# EAGLE board gyro-board (EAGLE 6.6.0)
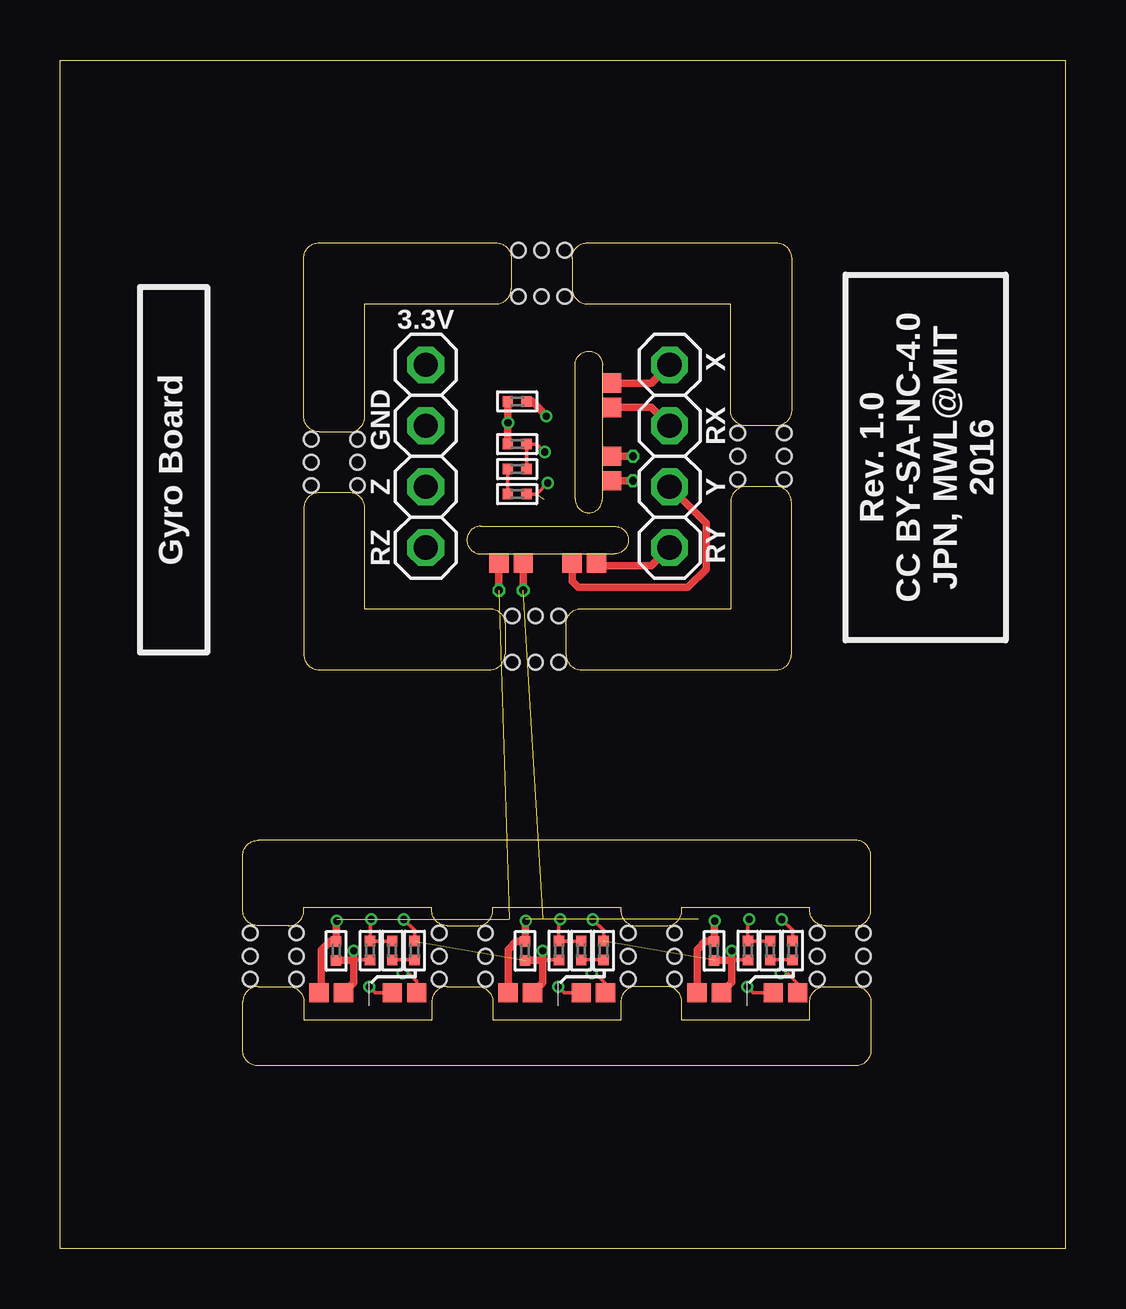
[diagram p0: board, top side]
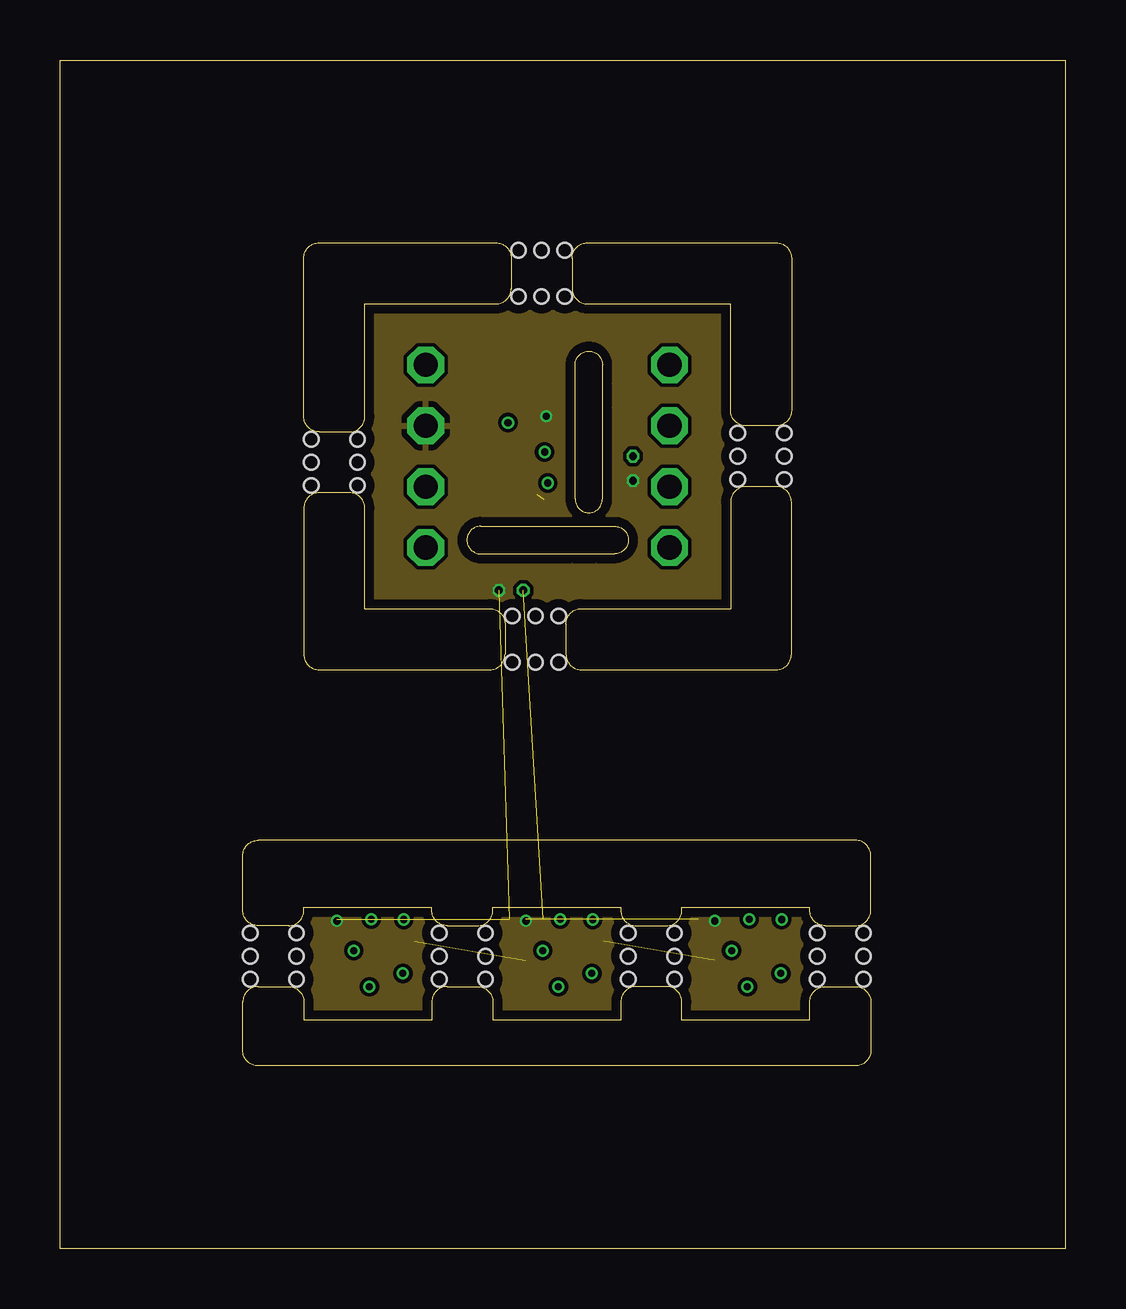
[diagram p1: board, inner layer Route2]
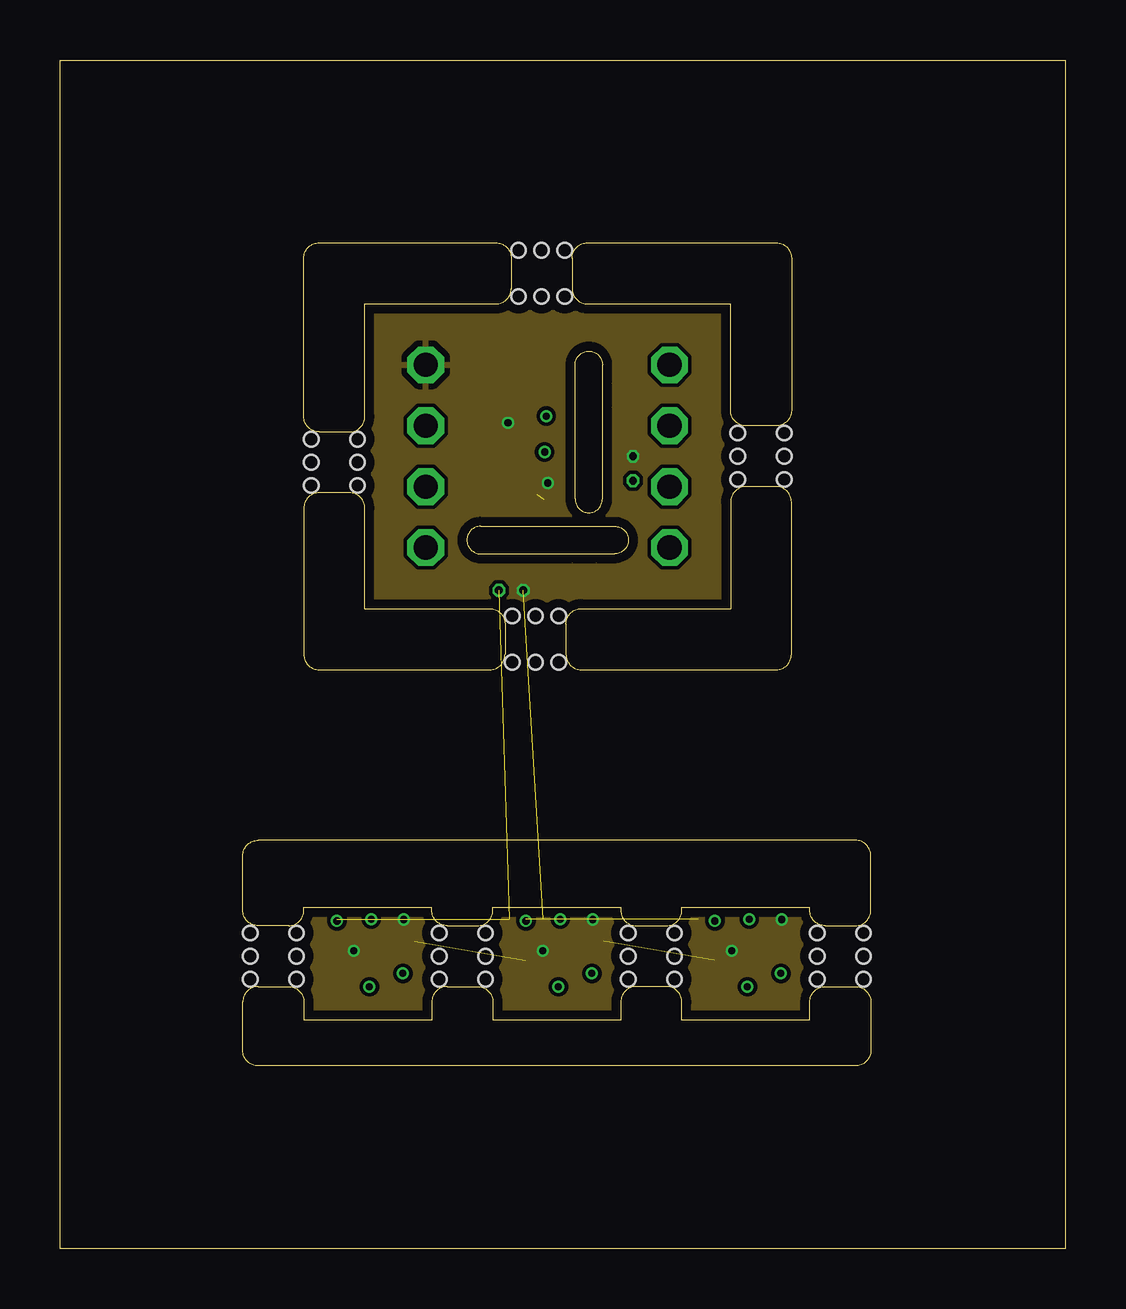
[diagram p2: board, inner layer Route15]
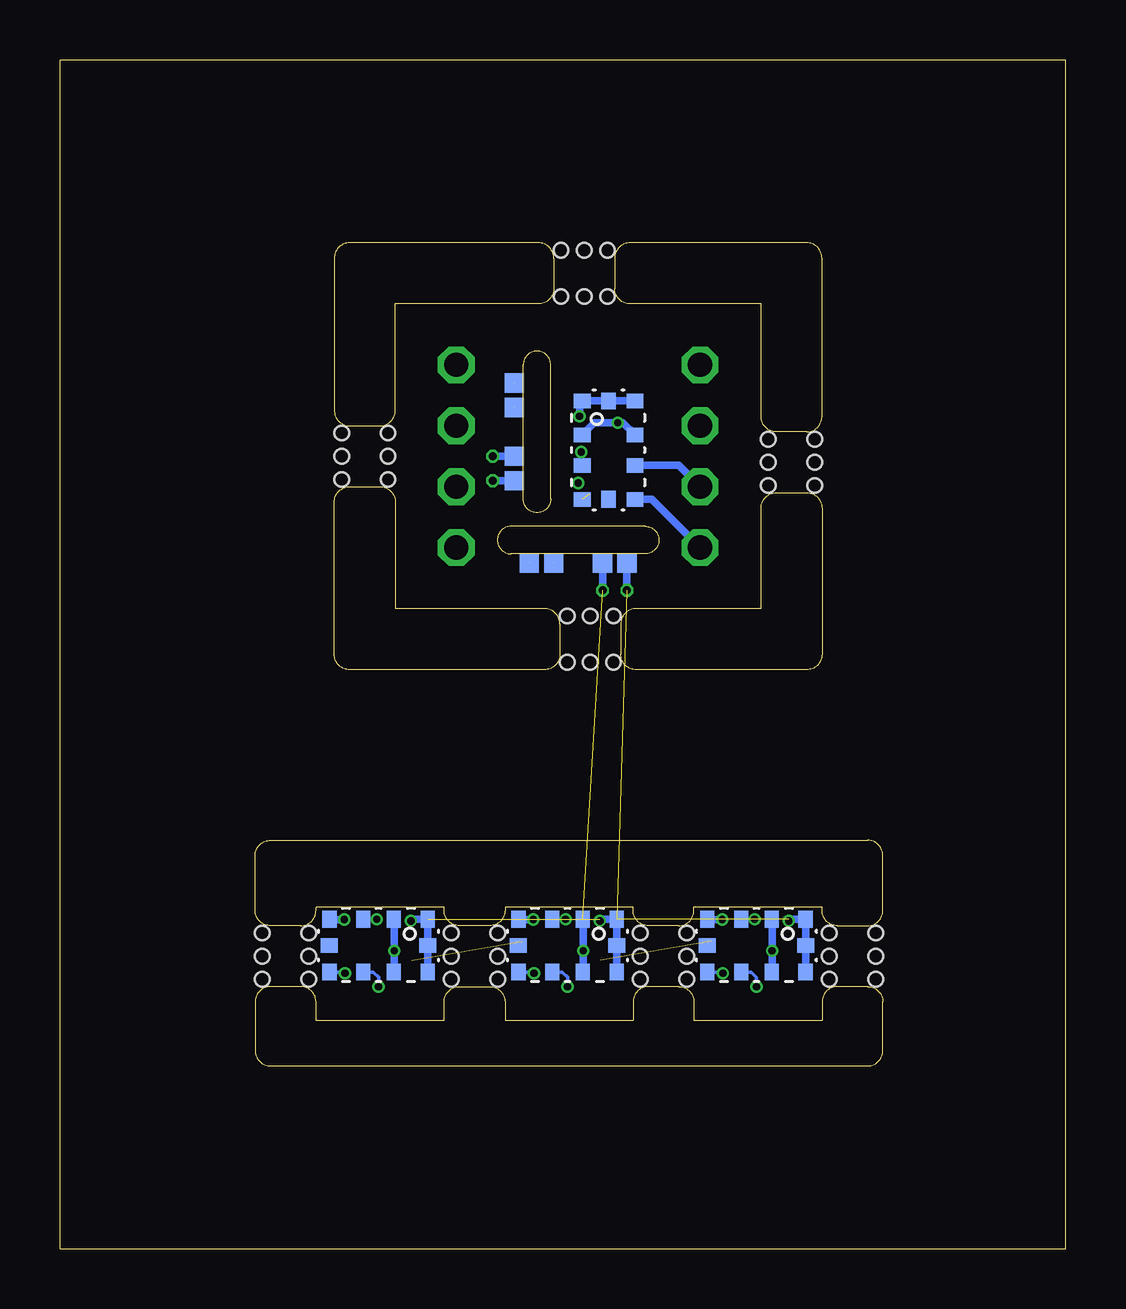
[diagram p3: board, bottom side, seen from below]

Size 41.91 x 49.53 mm. Coordinates in mm from the lower left corner, seen from the top.
Outline: 0,0 0,49.53 41.91,49.53 41.91,0 0,0
Outline: 8.26,10.92 9.53,10.92 arc-90 10.16,10.29 10.16,9.53 15.49,9.53 15.49,10.29 arc-90 16.13,10.92 17.4,10.92 arc-90 18.03,10.29 18.03,9.53 23.37,9.53 23.37,10.29 arc-90 24,10.92 25.27,10.92 arc-90 25.91,10.29 25.91,9.53 31.24,9.53 31.24,10.29 arc-90 31.88,10.92 33.15,10.92 arc-90 33.78,10.29 33.78,8.26 arc-90 33.15,7.62 8.26,7.62 arc-90 7.62,8.26 7.62,10.29 arc-90 8.26,10.92
Outline: 9.53,13.46 8.26,13.46 arc-90 7.62,14.1 7.62,16.38 arc-90 8.26,17.02 33.15,17.02 arc-90 33.78,16.38 33.78,14.1 arc-90 33.15,13.46 31.88,13.46 arc-90 31.24,14.1 31.24,14.22 25.91,14.22 25.91,14.1 arc-90 25.27,13.46 24,13.46 arc-90 23.37,14.1 23.37,14.22 18.03,14.22 18.03,14.1 arc-90 17.4,13.46 16.13,13.46 arc-90 15.49,14.1 15.49,14.22 10.16,14.22 10.16,14.1 arc-90 9.53,13.46
Outline: 12.7,26.67 12.7,30.86 arc90 12.06,31.5 10.79,31.5 arc90 10.16,30.86 10.16,24.77 arc90 10.79,24.13 17.91,24.13 arc90 18.54,24.77 18.54,26.04 arc90 17.91,26.67 12.7,26.67
Outline: 10.79,34.04 12.06,34.04 arc90 12.7,34.67 12.7,39.37 18.16,39.37 arc90 18.8,40.01 18.8,41.27 arc90 18.16,41.91 10.79,41.91 arc90 10.16,41.27 10.16,34.67 arc90 10.79,34.04
Outline: 30.48,24.77 30.48,31.11 arc90 29.84,31.75 28.57,31.75 arc90 27.94,31.11 27.94,26.67 21.72,26.67 arc90 21.08,26.04 21.08,24.77 arc90 21.72,24.13 29.84,24.13 arc90 30.48,24.77
Outline: 30.48,41.27 30.48,34.92 arc-90 29.84,34.29 28.57,34.29 arc-90 27.94,34.92 27.94,39.37 21.97,39.37 arc-90 21.34,40.01 21.34,41.27 arc-90 21.97,41.91 29.84,41.91 arc-90 30.48,41.27
Outline: 17.53,30.1 23.11,30.1 arc-180 23.11,28.96 17.53,28.96 arc-180 17.53,30.1
Outline: 21.46,31.24 21.46,36.83 arc-180 22.61,36.83 22.61,31.24 arc-180 21.46,31.24
Copper layers (1*2*15*16): Top 0.035mm / dielectric 0.2mm / Route2 0.0175mm / dielectric 0.3mm / Route15 0.0175mm / dielectric 0.2mm / Bottom 0.035mm
Design rules "seeed-studio-4-layer": minimum track width 6mil, minimum drill 0.3mm, track to track 6mil, track to pad 6mil, pad to pad 6mil, via to via 6mil, smd to smd 0mil, copper to edge 0.4mm, drill to drill 10mil, minimum pad ring 6mil, minimum via ring 4mil, stop-mask expansion 4mil, vias tented up to drill 100mil, thermal gap 10mil
Holes 0.6 mm at 9.86,13.16 9.86,12.19 9.86,11.23 7.92,13.16 7.92,12.19 7.92,11.23 33.48,13.16 33.48,12.19 33.48,11.23 31.55,13.16 31.55,12.19 31.55,11.23 17.73,13.16 17.73,12.19 17.73,11.23 15.8,13.16 15.8,12.19 15.8,11.23 25.6,13.16 25.6,12.19 25.6,11.23 23.67,13.16 23.67,12.19 23.67,11.23 12.4,33.73 12.4,32.77 12.4,31.8 10.46,33.73 10.46,32.77 10.46,31.8 30.18,33.99 30.18,33.02 30.18,32.05 28.24,33.99 28.24,33.02 28.24,32.05 18.85,26.37 19.81,26.37 20.78,26.37 18.85,24.43 19.81,24.43 20.78,24.43 19.1,41.61 20.07,41.61 21.03,41.61 19.1,39.67 20.07,39.67 21.03,39.67

## Footprints (pad centres in the part's own frame; a part is rotated, then mirrored left to right if it is on the bottom)
0201 = smd 0.432 x 0.432: 1 -0.394,0; 2 0.394,0
TP08SQ = smd 0.8 x 0.8: TP 0,0
LGA-10-COMPACT = smd 0.6 x 0.7: 1 2.05,1.1; 2 0.635,1.1; 3 -0.635,1.1; 4 -2.05,1.1; 6 -2.05,-1.1; 7 -0.635,-1.1; 8 0.635,-1.1; 9 2.05,-1.1 | smd 0.7 x 0.6: 5 -2.05,0; 10 2.05,0
1X04 = drill 1.016 octagon: 1 -3.81,0; 2 -1.27,0; 3 1.27,0; 4 3.81,0

## Placement (x,y rotation side)
C1  470nF  [0201]  11.51,12.41 270 top
C2  470nF  [0201]  13.85,12.43 270 top
C3  10nF  [0201]  12.92,12.43 270 top
C4  10nF  [0201]  20.79,12.43 270 top
C5  470nF  [0201]  21.72,12.43 270 top
C6  470nF  [0201]  19.38,12.41 270 top
C7  10nF  [0201]  28.66,12.43 270 top
C8  470nF  [0201]  29.59,12.43 270 top
C9  470nF  [0201]  27.25,12.41 270 top
C10  10nF  [0201]  19.05,33.53 180 top
C11  470nF  [0201]  19.05,32.49 180 top
C12  470nF  [0201]  19.05,35.31 180 top
R1  10k  [0201]  14.77,12.43 90 top
R2  10k  [0201]  22.65,12.43 90 top
R3  10k  [0201]  30.52,12.43 90 top
R4  10k  [0201]  19.05,31.45 0 top
TP1  [TP08SQ]  10.79,10.67 0 top
TP2  [TP08SQ]  14.86,10.67 0 top
TP3  [TP08SQ]  11.81,10.67 0 top
TP4  [TP08SQ]  18.67,10.67 0 top
TP5  [TP08SQ]  13.84,10.67 0 top
TP6  [TP08SQ]  22.73,10.67 0 top
TP7  [TP08SQ]  19.68,10.67 0 top
TP8  [TP08SQ]  21.72,10.67 0 top
TP9  [TP08SQ]  26.54,10.67 0 top
TP10  [TP08SQ]  30.73,10.67 0 top
TP11  [TP08SQ]  27.56,10.67 0 top
TP12  [TP08SQ]  29.72,10.67 0 top
TP13  [TP08SQ]  19.3,28.57 0 bottom
TP14  [TP08SQ]  22.35,28.57 90 top
TP15  [TP08SQ]  22.35,28.57 270 bottom
TP16  [TP08SQ]  21.34,28.57 270 bottom
TP17  [TP08SQ]  21.34,28.57 90 top
TP18  [TP08SQ]  22.99,35.05 0 top
TP19  [TP08SQ]  22.99,35.05 0 bottom
TP20  [TP08SQ]  22.99,36.07 0 top
TP21  [TP08SQ]  22.99,36.07 0 bottom
TP22  [TP08SQ]  19.3,28.57 0 top
TP23  [TP08SQ]  22.99,33.02 0 top
TP24  [TP08SQ]  22.99,33.02 0 bottom
TP25  [TP08SQ]  18.29,28.57 0 top
TP26  [TP08SQ]  18.29,28.57 0 bottom
TP27  [TP08SQ]  22.99,32 0 top
TP28  [TP08SQ]  22.99,32 0 bottom
U1  LY3200  [LGA-10-COMPACT]  12.89,12.63 0 bottom
U2  LY3200  [LGA-10-COMPACT]  20.76,12.63 0 bottom
U3  LY3200  [LGA-10-COMPACT]  28.64,12.63 0 bottom
U4  LY3200  [LGA-10-COMPACT]  19.05,33.27 90 bottom
U$2  PINHD-1X4  [1X04]  15.24,33.02 90 top
U$3  PINHD-1X4  [1X04]  25.4,33.02 270 top

## Library data of the parts
C1-C12 R1-R4 TP1-TP28 U1-U4 U$2 U$3 = jonnew

## Nets
+3.3V: C1.1 C6.1 C9.1 C12.1 TP1.TP TP4.TP TP9.TP TP25.TP TP26.TP TP27.TP TP28.TP U1.1 U1.9 U1.10 U2.1 U2.9 U2.10 U3.1 U3.9 U3.10 U4.1 U4.9 U4.10 U$2.3
GND: C1.2 C3.2 C4.2 C6.2 C7.2 C9.2 C10.2 C12.2 R1.2 R2.2 R3.2 R4.2 TP3.TP TP7.TP TP11.TP TP13.TP TP22.TP TP23.TP TP24.TP U1.2 U1.4 U1.8 U2.2 U2.4 U2.8 U3.2 U3.4 U3.8 U4.2 U4.4 U4.8 U$2.4
N$1: C4.1 C5.1 U2.3
N$2: C5.2 R2.1
N$3: C2.1 C3.1 U1.3
N$4: C2.2 R1.1
N$5: C7.1 C8.1 U3.3
N$6: C8.2 R3.1
N$7: C10.1 C11.1 U4.3
N$8: C11.2 R4.1
OUT: TP2.TP U1.6
OUT1: TP6.TP U2.6
OUT1_: TP20.TP TP21.TP U$3.1
OUT2: TP10.TP U3.6
OUT2_: TP16.TP TP17.TP U$3.3
OUT3: U4.6 U$2.1
REF1_: TP18.TP TP19.TP U$3.2
REF2_: TP14.TP TP15.TP U$3.4
REF3: U4.7 U$2.2
VREF: TP5.TP U1.7
VREF1: TP8.TP U2.7
VREF2: TP12.TP U3.7

## Tracks (layer width: path | path; a pad name or v marks a point on that pad's centre or on a via)
+3.3V  (via drill 0.3, 0.33)  (3 unrouted)
  Top 0.305: v11.54,13.66 11.51,13.66 C1.1 11.26,12.8 10.89,12.44 10.89,10.76 TP1.TP | C6.1 19.38,13.66 v19.41,13.66 | C6.1 19.13,12.8 | C9.1 27.25,13.66 v27.29,13.66 | C9.1 27,12.8 | TP9.TP 26.54,12.46 26.89,12.8 C9.1 | TP4.TP 18.67,12.46 19.01,12.8 C6.1 | v18.29,27.43 TP25.TP | v23.88,32 TP27.TP | C12.1 19.67,35.31 20.26,34.71 v20.26,34.69
  Bottom 0.305: v11.54,13.66 11.54,13.73 U1.1 U1.10 U1.9 | v19.41,13.66 19.41,13.73 U2.1 U2.10 U2.9 | v27.29,13.66 27.29,13.73 U3.1 U3.10 U3.9 | v18.29,27.43 TP25.TP | v23.88,32 TP27.TP | U4.9 18.72,35.32 arc45 18.94,35.42 U4.10 U4.1 20.26,35.21 v20.26,34.69
  pour Route2: -1,50.21 42.59,50.21 42.59,-2.54 -1,-2.54
GND  (via drill 0.3, 0.33)  (4 unrouted)
  Top 0.152: v12.24,12.41 v12.24,12.42 12.24,12.03 C3.2 | R1.2 14.78,13.26 v14.32,13.72 | v20.11,12.41 v20.11,12.42 20.11,12.03 C4.2 | R2.2 22.65,13.26 v22.2,13.72 | v27.99,12.41 v27.99,12.42 27.99,12.03 C7.2 | R3.2 30.52,13.26 v30.07,13.72 | R4.2 19.86,31.45 v20.32,31.91
  Top 0.305: TP3.TP 11.98,10.82 12.24,11.08 v12.24,12.42 12.24,12.02 C1.2 | TP7.TP 19.86,10.82 20.11,11.08 v20.11,12.42 20.11,12.02 C6.2 | C9.2 27.99,12.02 v27.99,12.42 27.99,11.1 TP11.TP | v19.3,27.43 TP22.TP | TP24.TP v23.88,33.02 | C12.2 v18.66,34.42 18.66,34.41 C10.2
  Bottom 0.152: U1.4 14.94,13.72 | 12.26,12.83 v12.24,12.42 | U2.4 22.81,13.72 | 20.13,12.83 v20.11,12.42 | U3.4 30.69,13.72 | 28,12.83 v27.99,12.42
  Bottom 0.305: 14.94,13.72 v14.32,13.72 | U1.8 12.24,11.53 v12.24,12.42 12.24,13.73 U1.2 | 22.81,13.72 v22.2,13.72 | U2.8 20.11,11.53 v20.11,12.42 20.11,13.73 U2.2 | 30.69,13.72 v30.07,13.72 | U3.8 27.99,11.53 v27.99,12.42 27.99,13.73 U3.2 | v19.3,27.43 TP22.TP | v23.88,33.02 TP24.TP | U4.8 18.46,34.42 v18.66,34.42 19.64,34.42 U4.2
  pour Route15: -2,51.21 43.59,51.21 43.59,-3.54 -2,-3.54
N$1  (via drill 0.3)
  Top 0.152: v20.84,13.73 20.79,13.68 C4.1 C5.1
  Bottom 0.152: U2.3 v20.84,13.73
N$2
  Top 0.152: R2.1 C5.2
N$3  (via drill 0.3)
  Top 0.152: v12.97,13.73 12.92,13.68 C3.1 C2.1
  Bottom 0.152: U1.3 v12.97,13.73
N$4
  Top 0.152: R1.1 C2.2
N$5  (via drill 0.3)
  Top 0.152: v28.72,13.73 28.66,13.68 C7.1 C8.1
  Bottom 0.152: U3.3 v28.72,13.73
N$6
  Top 0.152: R3.1 C8.2
N$7  (via drill 0.3)
  Top 0.152: v20.19,33.2 19.86,33.53 C10.1 C11.1
  Bottom 0.152: v20.19,33.2 20.19,32.68 U4.3
N$8
  Top 0.152: C11.2 18.71,32.46 18.66,32.41 R4.1
OUT  (via drill 0.3)
  Top 0.152: v14.29,11.47 14.55,11.45 14.86,11.14 TP2.TP
  Bottom 0.152: 14.94,11.42 U1.6 14.37,11.53 v14.29,11.47
OUT1  (via drill 0.3)
  Top 0.152: TP6.TP arc90 TP6.TP 22.73,11.05 22.33,11.45 v22.16,11.47
  Bottom 0.152: v22.16,11.47 22.24,11.53 U2.6
OUT1_  (1 unrouted)
  Top 0.305: TP20.TP 24.64,36.07 U$3.1
OUT2  (via drill 0.3)
  Top 0.152: TP10.TP 30.73,11.05 30.33,11.45 v30.04,11.47
  Bottom 0.152: v30.04,11.47 30.11,11.53 U3.6
OUT2_  (1 unrouted)
  Top 0.305: U$3.3 26.92,30.23 26.92,28.32 26.16,27.56 21.59,27.56 21.34,27.81 TP17.TP
OUT3
  Bottom 0.305: U4.6 17.25,31.22 U$2.1
REF1_  (1 unrouted)
  Top 0.305: TP18.TP 24.64,35.05 U$3.2
REF2_  (1 unrouted)
  Top 0.305: TP15.TP 22.48,28.45 24.64,28.45 U$3.4
REF3
  Bottom 0.305: U4.7 16.13,32.64 U$2.2
VREF  (via drill 0.3)
  Top 0.152: v12.89,10.91 13.14,10.67 TP5.TP
  Bottom 0.152: U1.7 13.11,11.53 12.89,11.31 v12.89,10.91
VREF1  (via drill 0.3)
  Top 0.152: TP8.TP 21.01,10.67 v20.76,10.91
  Bottom 0.152: U2.7 20.98,11.53 20.76,11.31 v20.76,10.91
VREF2  (via drill 0.3)
  Top 0.152: TP12.TP 28.89,10.67 v28.64,10.91
  Bottom 0.152: U3.7 28.86,11.53 28.64,11.31 v28.64,10.91

## Text on the board
tPlace: 3.3V | X | GND | RX | Rev. 1.0 / CC BY-SA-NC-4.0 / JPN, MWL@MIT / 2016 | Gyro Board | Z | Y | RZ | RY